# Altium PCB 盲文中控转接板V3.pcbdoc
Units mm, origin at the board's own origin, x right, y up, seen from the top; angles counter-clockwise.
Board outline 54.59 x 62.6 mm, 2 copper layers (Top Layer, Bottom Layer); 37 components, 44 nets, 139 pads, 40 vias.
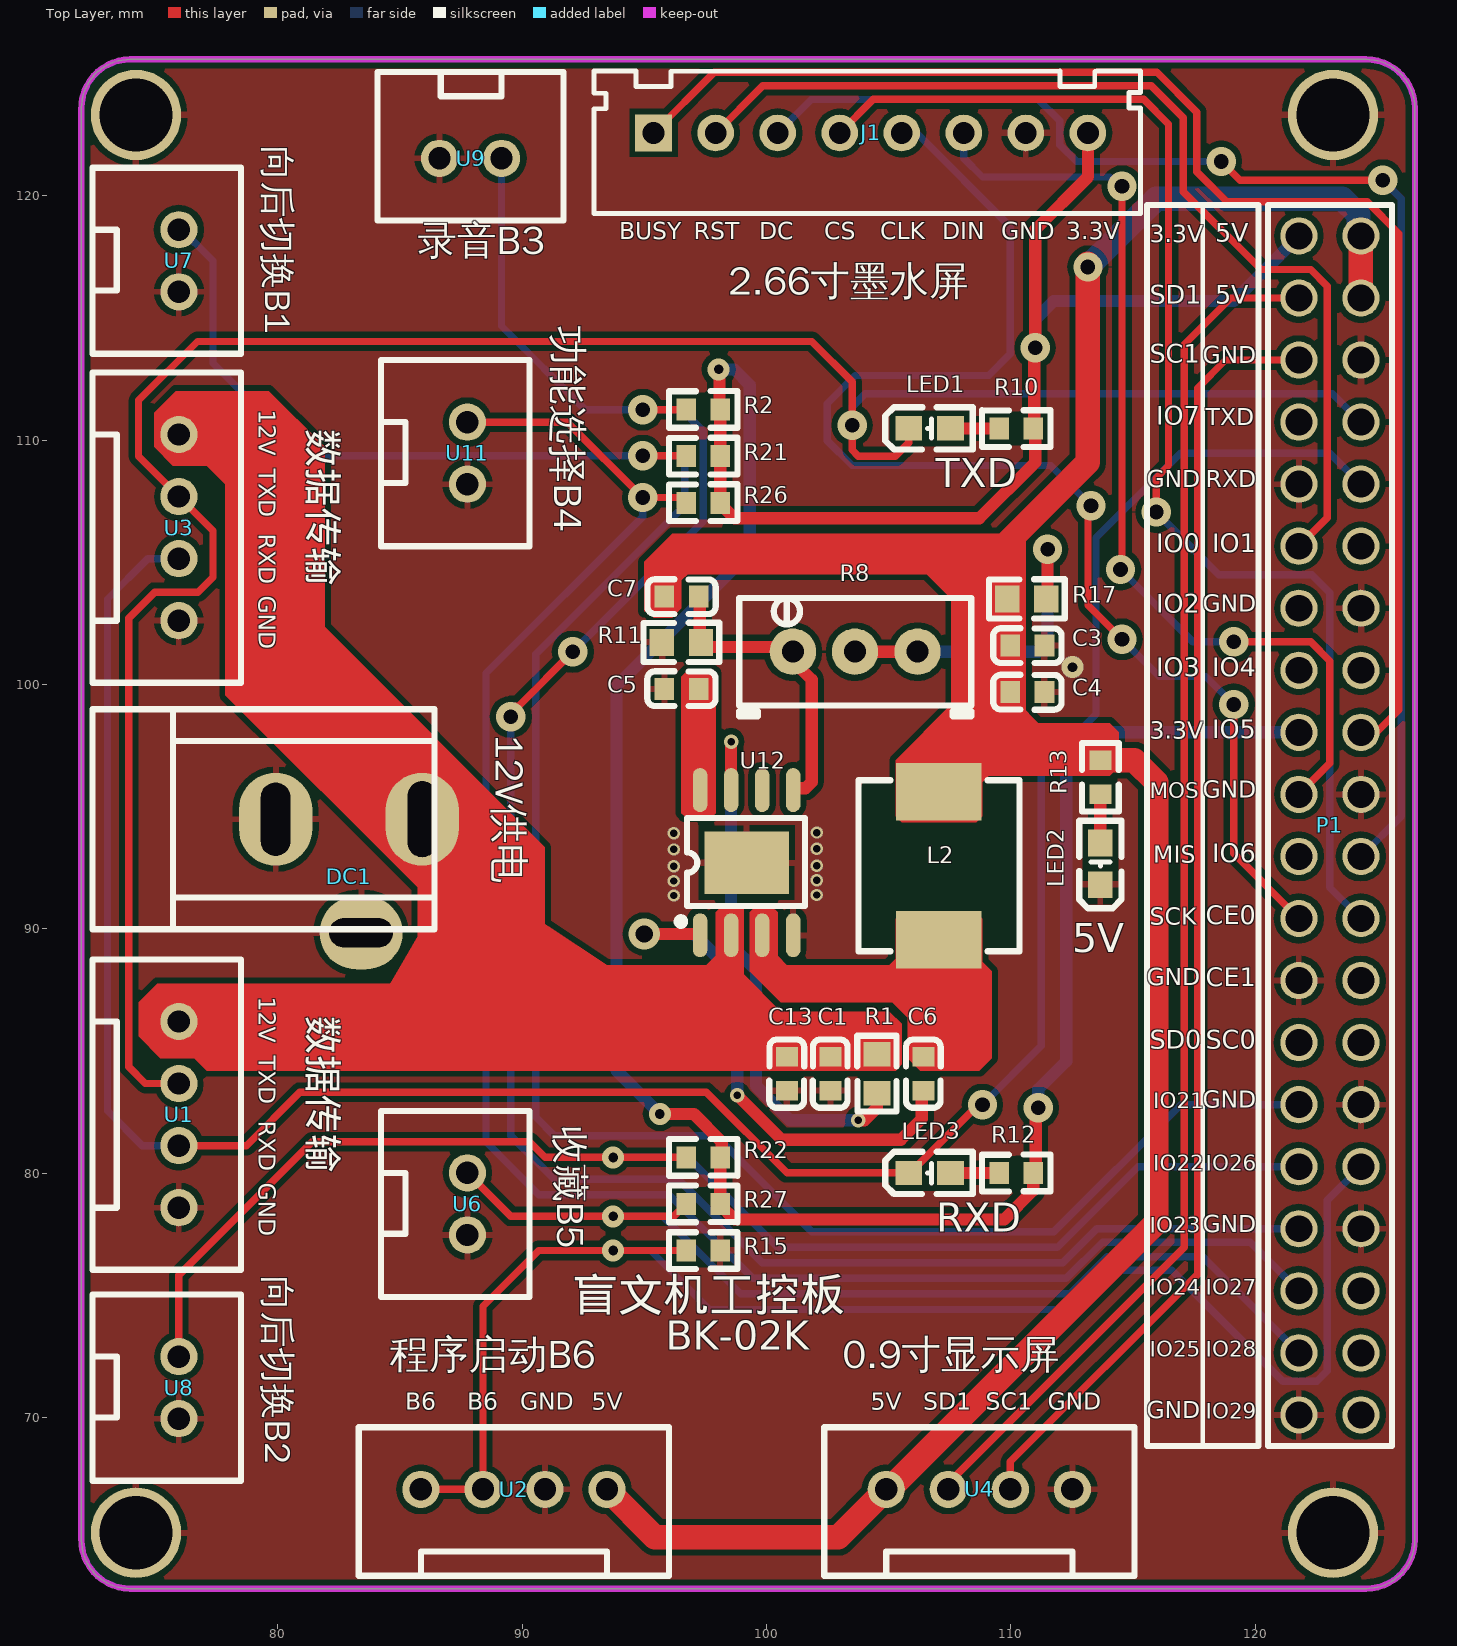
[diagram p0: Top Layer view]
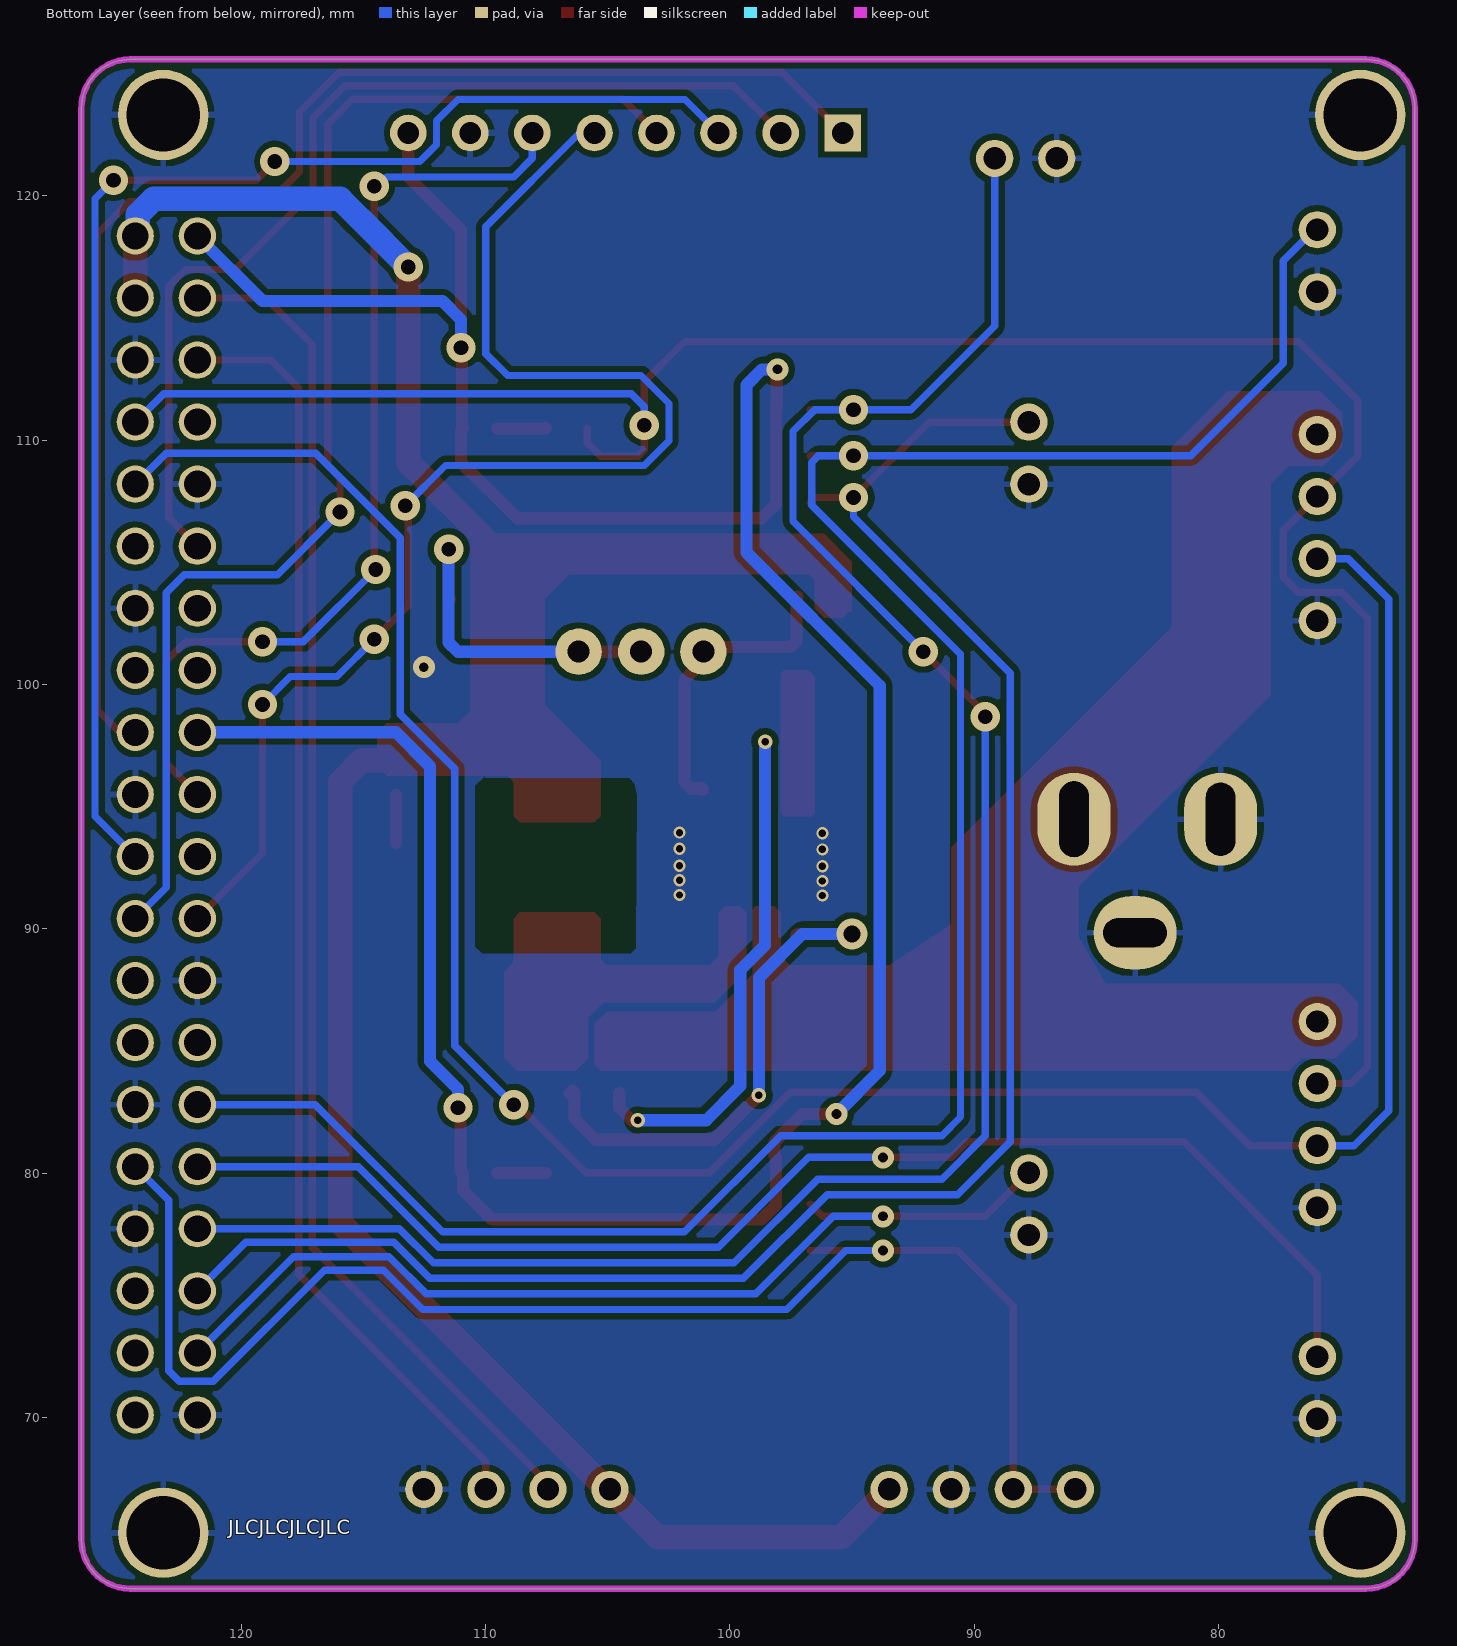
[diagram p1: Bottom Layer view, seen from below]

## Layer stack, top to bottom
Top Solder: solder mask 0.0102, Solder Resist, Dk 3.5
Top Layer: signal copper 0.0356
Dielectric1: dielectric 0.32, FR-4, Dk 4.8
Bottom Layer: signal copper 0.0356
Bottom Solder: solder mask 0.0102, Solder Resist, Dk 3.5

## Board outline
71.954,64.992 71.954,123.571 71.954,123.593 cw(c73.954,123.593) 73.954,125.593 124.541,125.593 cw(c124.541,123.593) 126.541,123.593 126.541,64.992 cw(c124.541,64.992) 124.541,62.992 73.954,62.992 cw(c73.954,64.992)

## Design rules (kind name [scope] priority, off if disabled: settings)
Clearance [All] p1: gap=0.254 ignorepadtopadclearanceinfootprint=FALSE except(0: Arc-Hole Track-Hole SMDPad-Hole THPad-Hole Via-Hole Fill-Hole Poly-Hole Region-Hole Text-Hole)
PolygonConnect [All] p1: connectstyle=Relief reliefconductorwidth=0.254 reliefentries=4 polygonreliefangle="90 Angle" airgapwidth=0.254
RoutingVias [All] p1: holewidth=0.711 width=1.27 viastyle="Through Hole" minholewidth=0.711 minwidth=1.27 maxholewidth=0.711 maxwidth=1.27
SolderMaskExpansion [All] p1: expansion=0.102
Width [All] p1: maxlimit=1 minlimit=0.254 preferedwidth=0.5 minimp=50.000000 maximp=50.000000 favimp=50.000000
30 further rules are at their usual default settings.

## Components (designator, comment, footprint, x,y, rotation, side; value= is the part's Value field where it differs from the comment)
C1 "10 uf" C0603 102.616,84.074 r90 top
C3 "22 uf" C0603 110.679,101.6 r180 top
C4 "22 uf" C0603 110.679,99.695 r180 top
C5 "0.1uf" C0603 96.52,99.822 r0 top
C6 "0.1uf" C0603 106.426,84.074 r90 top
C7 "200pf" C0603 96.52,103.606 r180 top
C13 "10uf" C0603 100.838,84.074 r90 top
DC1 "DC-5.5*2.1" DC5.5*2.1MM 82.906,92.163 r90 top
J1 "XH2.54_8P" XH2.54_8P 100.457,122.58 r90 top
L2 "10uh" IND-SMD_L7.0-W6.6_FXL0630 107.061,92.583 r90 top
LED1 "19-217/GHC-YR1S2/3T" LED0603-R-RD 106.68,110.49 r0 top
LED2 "19-217/GHC-YR1S2/3T" LED0603-R-RD 113.665,92.663 r90 top
LED3 "19-217/GHC-YR1S2/3T" LED0603-R-RD 106.68,80.01 r0 top
P1 "HDR-IDC-2.54-2X20P" IDC-TH_40P-P2.54_C9138 123.063,94.234 r270 top
R1 "100k" R0603#1 104.521,84.074 r90 top
R2 "10K" R0603#2 97.409,111.259 r0 top
R8 "20k" RES-ADJ-TH_3P-L9.5-W4.9-P2.50-L_3296W 103.632,101.346 r0 top
R10 "2K" R0603#2 110.221,110.477 r180 top
R11 "10k" R0603#1 96.52,101.727 r180 top
R12 "2K" R0603#2 110.221,80.01 r180 top
R13 "3.6K" R0603#2 113.665,96.204 r270 top
R15 "3.6K" R0603#2 97.409,76.835 r180 top
R17 "30k" R0603#1 110.655,103.505 r0 top
R21 "10K" R0603#2 97.409,109.347 r0 top
R22 "10K" R0603#2 97.409,80.645 r0 top
R26 "10K" R0603#2 97.409,107.442 r0 top
R27 "10K" R0603#2 97.409,78.74 r0 top
U1 "XH2.54 4P" "XH2.54 4P" 75.946,78.588 r90 top
U2 "XH2.54 4P" "XH2.54 4P" 93.472,67.056 r180 top (schematic designator U1)
U3 "XH2.54 4P" "XH2.54 4P" 75.946,102.616 r90 top (schematic designator U1)
U4 "XH2.54 4P" "XH2.54 4P" 112.522,67.056 r180 top (schematic designator U1)
U6 "XH2.54 2P" "XH2.54 2P" 90.297,77.47 r90 top
U7 "XH2.54 2P" "XH2.54 2P" 78.486,116.078 r90 top (schematic designator U6)
U8 "XH2.54 2P" "XH2.54 2P" 78.486,69.952 r90 top (schematic designator U6)
U9 "XH2.54 2P" "XH2.54 2P" 86.614,118.999 r0 top (schematic designator U6)
U11 "XH2.54 2P" "XH2.54 2P" 90.297,108.204 r90 top (schematic designator U6)
U12 "FR9888SPGTR" SOIC-8_L5.0-W4.0-P1.27-LS6.0-BL-EP 99.187,92.71 r0 top

## Footprints (in the part's own frame and the unit in brackets; to place one, negate y for a bottom-side part, rotate by r counter-clockwise, add the part's x,y. Pads: shape width x height; smd on the part's side, far side on the other; paste and mask are expansions set on the pad)
C0603 [mm]
  rect 0.8x0.9 smd: 1(-0.7,0) 2(0.7,0)
  silkscreen extent -1.4,-0.7 1.4,0.72
DC5.5*2.1MM [mm]
  oval 3.8x3 hole 1.2 slot 3.1 at 0 deg: 1(2.325,-3.001)
  oval 3.8x3 hole 1.2 slot 3 at 0 deg: 2(2.325,2.999)
  oval 3x3.4 hole 1.2 slot 2.6 at 90 deg: 3(-2.325,-0.5)
  silkscreen extent -2.17,-3.5 6.83,10.5
IDC-TH_40P-P2.54_C9138 [mil]
  round 60 hole 43.3: 1(-950,-50) 2(-950,50) 3(-850,-50) 4(-850,50) 5(-750,-50) 6(-750,50) 7(-650,-50) 8(-650,50) 9(-550,-50) 10(-550,50) 11(-450,-50) 12(-450,50) 13(-350,-50) 14(-350,50) 15(-250,-50) 16(-250,50) 17(-150,-50) 18(-150,50) 19(-50,-50) 20(-50,50) 21(50,-50) 22(50,50) 23(150,-50) 24(150,50) 25(250,-50) 26(250,50) 27(350,-50) 28(350,50) 29(450,-50) 30(450,50) 31(550,-50) 32(550,50) 33(650,-50) 34(650,50) 35(750,-50) 36(750,50) 37(850,-50) 38(850,50) 39(950,-50) 40(950,50)
IND-SMD_L7.0-W6.6_FXL0630 [mm]
  rect 2.35x3.5 smd: 1(-3.035,0) 2(3.035,0)
  silkscreen extent -3.5,-3.3 3.5,3.3
LED0603-R-RD [mil]
  rect 43x39 smd: 1(33.5,0) 2(-33.5,0)
  silkscreen extent -72,-34 70,34
R0603#1 [mm]
  rect 1x1.1 smd: 1(-0.8,0) 2(0.8,0)
  silkscreen extent -1.55,-0.8 1.55,0.81
R0603#2 [mm]
  rect 0.8x0.9 smd: 1(-0.7,0) 2(0.7,0)
  silkscreen extent -1.4,-0.75 1.4,0.76
RES-ADJ-TH_3P-L9.5-W4.9-P2.50-L_3296W [mm]
  round 1.9 hole 0.9: 1(-2.55,0) 2(-0.01,0) 3(2.55,0)
  silkscreen extent -4.75,-2.64 4.75,2.2
SOIC-8_L5.0-W4.0-P1.27-LS6.0-BL-EP [mm]
  oval 0.6x1.8 smd: 1(-1.905,-2.972) 2(-0.635,-2.972) 3(0.635,-2.972) 4(1.905,-2.972) 5(1.905,2.972) 6(0.635,2.972) 7(-0.635,2.972) 8(-1.905,2.972)
  rect 3.45x2.56 smd: 9(0,0)
  silkscreen extent -2.84,-2.56 2.39,1.83
"XH2.54 2P" [mil]
  round 60 hole 36: 1(0,100) 2(100,100)
  silkscreen extent -100,0 200,239
"XH2.54 4P" [mil]
  round 60 hole 36: 1(0,0) 2(100,0) 3(200,0) 4(300,0)
  silkscreen extent -100,-100 400,139
XH2.54_8P [mm]
  rect 1.5x1.5 hole 0.889: 1(0,5.08)
  round 1.5 hole 0.889: 2(0,2.54) 3(0,0) 4(0,-2.54) 5(0,-5.08) 6(0,-7.62) 7(0,-10.16) 8(0,-12.7)
  silkscreen extent -3.3,-14.86 2.54,7.52

## Free pads (board coordinates)
  round 3.7 hole 3: ""(74.19,65.278) ""(74.19,123.317) ""(123.19,65.278) ""(123.19,123.317)

## Via types
v1: diameter 1.2, hole 0.6, Top Layer to Bottom Layer, 20 vias
v2: diameter 0.5, hole 0.3, Top Layer to Bottom Layer, 10 vias
v3: diameter 0.9, hole 0.4, Top Layer to Bottom Layer, 6 vias
v4: diameter 0.6, hole 0.3, Top Layer to Bottom Layer, 3 vias
v5: diameter 1.27, hole 0.711, Top Layer to Bottom Layer, 1 vias

## Nets (pads, with @x,y where several pads share a name; then routed paths per layer and width w, separated by ;. In a path a pad name is that pad's centre, name@x,y a point inside that pad or via, vN(x,y) a via of type N, cw(c..) or ccw(c..) an arc to the next point about the centre after c; other vN are vias at no path point)
3.3V: J1.8 P1.1 P1.17 R2.2 R10.1 R12.1 R21.2 R22.2 R26.2 R27.2 | length 129.2
  Top Layer w0.5: v3(95.631,82.423) 97.028,82.423 98.171,81.28 98.171,80.707 R22.2 R27.2 98.109,78.69 98.694,78.105 109.728,78.105 110.921,79.298 R12.1 111.023,80.112 111.023,82.575 v1(111.125,82.677) ; v3(98.044,112.903) 98.077,112.87 98.077,111.291 98.109,111.386 R2.2 R21.2 R26.2 98.109,107.392 98.694,106.807 108.712,106.807 110.998,109.093 110.998,110.399 R10.1 110.959,110.515 110.959,113.753 v1(110.998,113.792) 110.998,118.618 113.157,120.777 J1.8
  Bottom Layer w0.5: v3(95.631,82.423) 93.857,84.197 93.857,99.953 99.314,105.41 99.314,112.268 98.679,112.903 v3(98.044,112.903) ; v1(110.998,113.792) 110.998,114.935 111.76,115.697 119.126,115.697 P1.1 ; v1(111.125,82.677) 111.125,83.439 112.268,84.582 112.268,96.647 113.665,98.044 P1.17
5V: C3.2 C4.2 C7.2 L2.2 P1.2 P1.4 R13.1 R17.1 U2.1 U4.4 | length 81.8
  Top Layer w1: U2.1 95.432,65.096 102.942,65.096 U4.4 ; U4.4@104.965,66.992 115.951,77.978 115.951,96.012 115.059,96.904 R13.1 112.207,96.904 ; R17.1 109.855,105.801 113.157,109.103 v1(113.157,117.094) v1@113.157,117.221 ; P1.4 P1.2
  Bottom Layer w1: v1(113.157,117.094) 115.105,119.042 115.115,119.042 115.908,119.835 115.908,119.845 115.951,119.888 123.571,119.888 124.233,119.226 124.233,118.464 P1.2
12V: C1.2 C13.2 DC1.1 R1.2 U1.4 U3.4 U12.2
B1: P1.29 R21.1 U7.2 | length 93.6
  Top Layer w0.3: v1(94.933,109.37) 96.686,109.37 R21.1
  Bottom Layer w0.3: U7.2@75.946,118.745 77.343,117.348 77.343,113.157 81.13,109.37 v1(94.933,109.37) 96.37,109.37 96.647,109.093 96.647,107.338 90.551,101.242 90.551,82.296 91.313,81.534 97.917,81.534 101.854,77.597 111.76,77.597 116.967,82.804 P1.29
B2: P1.31 R22.1 U8.2 | length 57.6
  Top Layer w0.3: U8.2 75.946,75.819 81.407,81.28 90.297,81.28 90.932,80.645 v3(93.726,80.645) R22.1
  Bottom Layer w0.3: v3(93.726,80.645) 96.774,80.645 100.457,76.962 111.908,76.962 115.21,80.264 P1.31
B3: P1.33 R2.1 U9.2 | length 85.6
  Top Layer w0.3: v1@89.471,99.123 89.852,99.123 v1(92.075,101.346) ; v1(94.933,111.252) 96.702,111.252 R2.1
  Bottom Layer w0.3: U9.2@89.154,121.555 U9.2 89.154,114.681 92.583,111.252 v1(94.933,111.252) 96.52,111.252 97.409,110.363 97.409,106.68 v1(92.075,101.346) ; v1(89.535,98.679) 89.535,81.534 91.313,79.756 96.393,79.756 99.822,76.327 112.125,76.327 113.522,77.724 P1.33
B4: P1.35 R26.1 U11.2 | length 76.4
  Top Layer w0.3: U11.2 91.844,110.744 v1(94.933,107.655) 96.496,107.655 R26.1
  Bottom Layer w0.3: v1(94.933,107.655) 94.933,106.871 88.519,100.457 88.519,81.28 90.678,79.121 96.012,79.121 99.441,75.692 112.274,75.692 113.752,77.17 119.807,77.17 P1.35
B5: P1.37 R27.1 U6.2 | length 41.5
  Top Layer w0.3: U6.2 89.535,78.232 v3(93.726,78.232) 96.201,78.232 R27.1
  Bottom Layer w0.3: v3(93.726,78.232) 95.758,78.232 98.933,75.057 112.422,75.057 113.946,76.581 117.856,76.581 P1.37
B6: P1.32 R15.2 U2.3 U2.4 | length 61.2
  Top Layer w0.3: U2.4 U2.3 88.392,74.549 90.678,76.835 R15.2
  Bottom Layer w0.3: v3(93.726,76.835) 95.25,76.835 97.663,74.422 112.571,74.422 114.176,76.027 116.586,76.027 121.135,71.478 122.532,71.478 122.959,71.905 122.959,78.89 P1.32
BUSY: J1.1 P1.18 | length 57.1
  Top Layer w0.3: J1.1 97.859,125.062 114.079,125.062 115.984,125.062 117.614,123.432 117.614,120.996 118.849,119.761 124.585,119.761 125.881,118.465 125.881,98.957 124.968,98.044 P1.18
CE1: P1.26
CLK: J1.5 P1.23 | length 54.6
  Top Layer w0.3: v1(113.284,107.315) 113.157,107.188 113.157,103.251 v1(114.554,101.854) ; v1(119.126,99.187) 119.126,93.091 P1.23
  Bottom Layer w0.3: J1.5 106.147,122.58 109.982,118.745 109.982,113.538 109.093,112.649 103.632,112.649 102.489,111.506 102.489,109.982 103.505,108.966 111.633,108.966 v1(113.284,107.315) ; v1(114.554,101.854) 116.078,100.33 117.983,100.33 v1(119.126,99.187)
CS: J1.4 P1.24 | length 52.8
  Top Layer w0.3: J1.4 104.371,123.954 115.441,123.954 116.459,122.936 116.459,108.966 115.951,108.458 v1(115.951,107.061)
  Bottom Layer w0.3: v1@116.205,107.061 116.205,106.807 118.514,104.498 122.324,104.498 123.063,103.759 123.063,91.694 P1.24
DC: J1.3 P1.22 | length 56
  Top Layer w0.3: v1(118.618,121.412) 119.38,120.65 v1(125.222,120.65)
  Bottom Layer w0.3: J1.3 101.829,123.952 111.125,123.952 112.003,123.074 112.003,122.102 112.693,121.412 v1(118.618,121.412) ; P1.22 125.984,94.615 125.984,119.888 v1(125.222,120.65)
DIN: J1.6 P1.19 | length 39.5
  Top Layer w0.3: v1(114.49,104.712) 114.554,104.775 v1(114.554,120.396) ; v1(119.126,101.75) 122.276,101.75 123.063,100.963 123.063,96.774 P1.19
  Bottom Layer w0.3: J1.6 108.077,121.539 108.839,120.777 114.046,120.777 v1@114.3,120.523 ; v1(114.49,104.712) 117.452,101.75 v1(119.126,101.75)
GND: C1.1 C3.1 C4.1 C5.1 C13.1 DC1.2 DC1.3 J1.7 LED2.2 P1.6 P1.9 P1.14 P1.20 P1.25 P1.30 P1.34 P1.39 pad. R11.2 R15.1 U1.1 U2.2 U3.1 U4.1 U6.1 U7.1 U8.1 U9.1 U11.1 U12.4 U12.9
  other v2: 96.206,91.365 102.053,91.389 96.206,91.962 102.053,91.986 96.206,92.559 102.053,92.583 96.206,93.254 102.053,93.278 96.206,93.915 102.053,93.939
  other v3: 112.522,100.711
GPIO1: P1.12
GPIO2: P1.13
GPIO3: P1.15
GPIO4: P1.16
GPIO7: P1.7
GPIO24: 
GPIO27: P1.36
GPIO28: P1.38
GPIO29: P1.40
L2_1: C6.2 L2.1 U12.3
LED1_1: LED1.1 R10.2 | length 2
  Top Layer w0.5: LED1.1 107.538,110.483 109.514,110.483 R10.2
LED3_1: LED3.1 R12.2 | length 2
  Top Layer w0.5: LED3.1 R12.2
MISO: P1.21
P1_2: 
R13_2: LED2.1 R13.2 | length 2
  Top Layer w0.5: LED2.1 R13.2
R17_2: R8.2 R8.3 R17.2 | length 13.9
  Top Layer w0.5: R8.2 R8.3 ; R17.2 111.506,103.556 v1(111.506,105.537)
  Bottom Layer w0.5: R8.3 111.125,101.346 111.506,101.727 v1(111.506,105.537)
RST: J1.2 P1.11 | length 42.1
  Top Layer w0.3: J1.2 99.845,124.508 115.755,124.508 117.06,123.203 117.06,120.176 120.246,116.99 122.278,116.99 122.959,116.309 122.959,106.83 P1.11
RXD: LED3.2 P1.10 U1.2 U3.2 | length 102.3
  Top Layer w0.3: U1.2 78.715,81.128 80.899,83.312 97.536,83.312 100.838,80.01 LED3.2 105.88,80.01 108.674,82.804 v1(108.839,82.804)
  Bottom Layer w0.3: U1.2 74.447,81.128 73.025,82.55 73.025,103.505 74.676,105.156 U3.2 ; v1(108.839,82.804) 111.252,85.217 111.252,96.556 113.486,98.79 113.486,106.016 116.944,109.474 123.063,109.474 P1.10
S$68: 
SCL0: P1.28
SCL1: P1.5 U4.2 | length 52.9
  Top Layer w0.3: U4.2 109.982,68.199 117.648,75.865 117.648,112.141 118.791,113.284 P1.5
SDA0: P1.27
SDA1: P1.3 U4.3 | length 56.3
  Top Layer w0.3: U4.3 107.442,67.31 117.094,76.962 117.094,113.919 118.999,115.824 P1.3
TXD: LED1.2 P1.8 U1.3 U3.3 | length 92.6
  Top Layer w0.3: U1.3 74.574,83.668 73.891,84.351 73.891,102.72 74.953,103.782 76.731,103.782 77.343,104.394 77.343,106.299 U3.3 74.295,109.347 74.295,111.633 76.708,114.046 101.854,114.046 103.505,112.395 v1(103.505,110.617) 103.505,109.601 103.759,109.347 105.283,109.347 105.829,109.893 LED1.2
  Bottom Layer w0.3: v1(103.505,110.617) 103.505,111.379 104.036,111.91 123.167,111.91 P1.8
U12_1: C6.1 U12.1 | length 21.7
  Top Layer w0.5: v5(94.996,89.789) 97.231,89.789 U12.1 ; v4(98.806,83.185) 100.626,81.365 105.495,81.365 106.354,82.224 106.354,83.302 C6.1 C6.1@106.553,83.247
  Bottom Layer w0.5: v5(94.996,89.789) 97.028,89.789 98.806,88.011 v4(98.806,83.185)
U12_5: C7.1 R8.1 R11.1 U12.5 | length 12.4
  Top Layer w0.5: C7.1 97.27,103.556 97.27,101.777 R11.1 97.51,101.536 100.891,101.536 R8.1 101.082,100.967 101.854,100.195 101.854,96.012 101.6,95.758 101.138,95.758 101.092,95.712 U12.5
U12_7: R1.1 U12.7 | length 22.8
  Top Layer w0.5: U12.7 v4(98.552,97.663) ; v4(103.759,82.169) 104.013,82.169 104.521,82.677 R1.1
  Bottom Layer w0.5: v4(98.552,97.663) 98.552,89.331 99.568,88.315 99.568,83.566 100.965,82.169 v4(103.759,82.169)
U12_8: C5.2 U12.8
pads on no net: U12.6

## Polygon pours and split planes (outlines as drawn)
GND on Bottom Layer "Top Layer-No Net" (solid, pour order 0): 71.954,64.992 71.954,123.571 71.954,123.593 cw(c73.954,123.593) 73.954,125.593 124.541,125.593 cw(c124.541,123.593) 126.541,123.593 126.541,64.992 cw(c124.541,64.992) 124.541,62.992 73.954,62.992 cw(c73.954,64.992)
GND on Top Layer "Top Layer-No Net1" (solid, pour order 1): 71.954,64.992 71.954,123.571 71.954,123.593 cw(c73.954,123.593) 73.954,125.593 124.541,125.593 cw(c124.541,123.593) 126.541,123.593 126.541,64.992 cw(c124.541,64.992) 124.541,62.992 73.954,62.992 cw(c73.954,64.992)

## Keep-outs
Keep-Out Layer:
  lines w0.254: 71.954,123.571 71.954,64.992 ccw(c73.954,64.992) 73.954,62.992 124.541,62.992 ccw(c124.541,64.992) 126.541,64.992 126.541,123.593 ccw(c124.541,123.593) 124.541,125.593 73.954,125.593 ccw(c73.954,123.593) 71.954,123.593

## Other copper
Top Layer:
  pour cut-out: 103.805,95.466 103.9,95.937 104.122,96.159 110.028,96.159 110.028,96.234 110.409,95.853 110.409,89.274 110.127,88.992 104.066,88.984 103.841,89.209 103.841,89.438
  region: 98.679,98.298
  region net U12_8: 96.52,100.33 96.774,100.584 97.79,100.584 97.917,100.457 97.917,94.742 97.79,94.615 96.647,94.615 96.52,94.742
  region net 5V: 94.996,102.997 95.123,102.997 95.377,102.743 96.139,102.743 96.52,103.124 96.52,104.267 96.774,104.521 106.553,104.521 108.839,102.235 110.617,104.013 110.617,106.172 96.139,106.172 94.996,105.029
  region net 5V: 110.236,99.187 110.363,99.187 111.125,98.425 114.046,98.425 114.427,98.044 114.427,96.647 114.046,96.266 109.093,96.266 108.712,95.885 107.95,96.647 107.95,96.901
  region net 5V: 105.283,94.615 105.537,94.361 108.585,94.361 108.839,94.615 108.839,96.266 110.617,98.044 110.617,104.394 110.363,104.648 108.712,104.648 107.569,103.505 107.569,99.187 105.283,96.901
  region net L2_1: 99.314,90.678 99.568,90.932 100.203,90.932 100.457,90.678 100.457,88.9 100.838,88.519 105.029,88.519 105.283,88.773 105.283,90.424 105.537,90.678 108.585,90.678 108.839,90.424 108.839,88.646 109.22,88.265 109.22,84.709 108.712,84.201 106.299,84.201 105.791,84.709 105.791,86.36 105.156,86.995 100.584,86.995 99.314,88.265
  region net 12V: 76.042,85.248 77.089,84.201 83.058,84.201 83.566,84.709 83.439,84.836 83.439,85.852
  region net 12V: 87.383,92.535 93.472,88.519 97.536,88.519 97.917,88.9 97.917,90.678 98.171,90.932 98.933,90.932 99.06,90.805 99.06,88.138 100.584,86.614 105.029,86.614 105.537,86.106 105.537,84.455 105.283,84.201 105.156,84.201 83.058,84.201 82.818,84.681
  region net 12V: 74.93,111.125 75.819,112.014 79.629,112.014 81.915,109.728 81.915,102.362 90.932,93.345 90.932,89.408 86.233,84.709 75.184,84.709 74.295,85.598 74.295,86.995 75.057,87.757 84.582,87.757 85.725,88.9 85.725,91.694 77.851,99.568 77.851,108.204 77.089,108.966 75.692,108.966 74.93,109.728
Bottom Layer:
  pour cut-out: 103.805,95.466 103.9,95.937 104.122,96.159 110.028,96.159 110.028,96.234 110.409,95.853 110.409,89.274 110.127,88.992 104.066,88.984 103.841,89.209 103.841,89.438

## Silkscreen, mask and mechanical layers (free items; w line width, h text height)
Top Overlay:
  lines w0.2: 117.856,68.834 117.856,119.634
  lines w0.254: 115.57,119.634 120.142,119.634 120.142,68.834 116.332,68.834 115.57,68.834 115.57,119.634 ; 115.57,119.634 115.57,119.634 ; 120.523,68.834 120.523,119.634 125.603,119.634 125.603,68.834 120.523,68.834
  text "向后切换B1" at 79.121,122.047 h1.83 r270
  text "BUSY" at 93.98,117.983 h1.2
  text "RST" at 97.028,117.983 h1.2
  text "DC" at 99.695,117.983 h1.2
  text "CS" at 102.362,117.983 h1.2
  text "CLK" at 104.648,117.983 h1.2
  text "DIN" at 107.188,117.983 h1.2
  text "GND" at 109.601,117.983 h1.2
  text "3.3V" at 112.268,117.983 h1.2
  text "3.3V" at 115.697,117.855 h1.2
  text "5V" at 118.364,117.856 h1.3
  text "录音B3" at 85.725,117.221 h2.03
  text "2.66寸墨水屏" at 98.425,115.57 h2.03
  text "SD1" at 115.697,115.316 h1.3
  text "5V" at 118.364,115.316 h1.3
  text "功能选择B4" at 90.932,114.681 h2.03 r270
  text "SC1" at 115.697,112.903 h1.3
  text "GND" at 117.856,112.903 h1.2
  text "12V" at 78.969,111.252 h1.2 r270
  text "数据传输" at 80.899,110.49 h2.03 r270
  text "IO7" at 115.951,110.363 h1.3
  text "TXD" at 117.983,110.363 h1.2
  text "TXD" at 78.969,108.839 h1.2 r270
  text "GND" at 115.57,107.823 h1.2
  text "RXD" at 117.983,107.823 h1.2
  text "TXD" at 106.934,107.696 h2.03
  text "RXD" at 78.969,106.172 h1.2 r270
  text "IO0" at 115.951,105.156 h1.3
  text "IO1" at 118.237,105.156 h1.3
  text "GND" at 78.969,103.632 h1.2 r270
  text "GND" at 117.856,102.743 h1.2
  text "IO2" at 115.951,102.679 h1.3
  text "IO3" at 115.951,100.076 h1.3
  text "IO4" at 118.237,100.076 h1.3
  text "12V供电" at 88.519,97.917 h2.03 r270
  text "3.3V" at 115.697,97.535 h1.2
  text "IO5" at 118.237,97.536 h1.3
  text "MOS" at 115.697,95.123 h1.1
  text "GND" at 117.856,95.123 h1.2
  text "MIS" at 115.824,92.456 h1.2
  text "IO6" at 118.237,92.456 h1.3
  text "SCK" at 115.697,89.916 h1.2
  text "CE0" at 117.983,89.916 h1.3
  text "5V" at 112.522,88.646 h2.03
  text "GND" at 115.57,87.44 h1.2
  text "CE1" at 117.983,87.376 h1.3
  text "12V" at 78.969,87.224 h1.2 r270
  text "数据传输" at 80.899,86.462 h2.03 r270
  text "SD0" at 115.697,84.836 h1.3
  text "SC0" at 117.983,84.836 h1.3
  text "TXD" at 78.969,84.811 h1.2 r270
  text "IO21" at 115.824,82.423 h1.1
  text "GND" at 117.856,82.423 h1.2
  text "RXD" at 78.969,82.144 h1.2 r270
  text "收藏B5" at 91.059,81.915 h1.93 r270
  text "IO22" at 115.824,79.883 h1.1
  text "IO26" at 117.983,79.883 h1.1
  text "GND" at 78.969,79.604 h1.2 r270
  text "IO23" at 115.697,77.343 h1.1
  text "GND" at 117.856,77.343 h1.2
  text "RXD" at 106.952,77.216 h2.03
  text "向后切换B2" at 79.121,75.794 h1.83 r270
  text "IO24" at 115.697,74.803 h1.1
  text "IO27" at 117.983,74.803 h1.1
  text "盲文机工控板" at 92.075,73.914 h2.33
  text "BK-02K" at 95.885,72.39 h2.03
  text "IO25" at 115.697,72.262 h1.1
  text "IO28" at 117.983,72.263 h1.1
  text "程序启动B6" at 84.582,71.628 h2.03
  text "0.9寸显示屏" at 103.124,71.628 h2.03
  text "B6" at 85.217,70.079 h1.2
  text "B6" at 87.757,70.079 h1.2
  text "GND" at 89.916,70.079 h1.2
  text "5V" at 92.837,70.079 h1.2
  text "5V" at 104.267,70.079 h1.2
  text "SD1" at 106.426,70.079 h1.2
  text "SC1" at 108.966,70.079 h1.2
  text "GND" at 111.506,70.079 h1.2
  text "GND" at 115.57,69.723 h1.2
  text "IO29" at 117.983,69.722 h1.1
Bottom Overlay:
  text "JLCJLCJLCJLC" at 120.523,65.024 h1